# Altium PCB PCB2_Drone.PcbDoc
Units mm, origin at the board's own origin, x right, y up, seen from the top; angles counter-clockwise.
Board outline 152.4 x 101.6 mm, 2 copper layers (Top Layer, Bottom Layer); 15 components, 11 nets, 54 pads, 10 vias.
Unrouted connection lines stored in the file: 1.
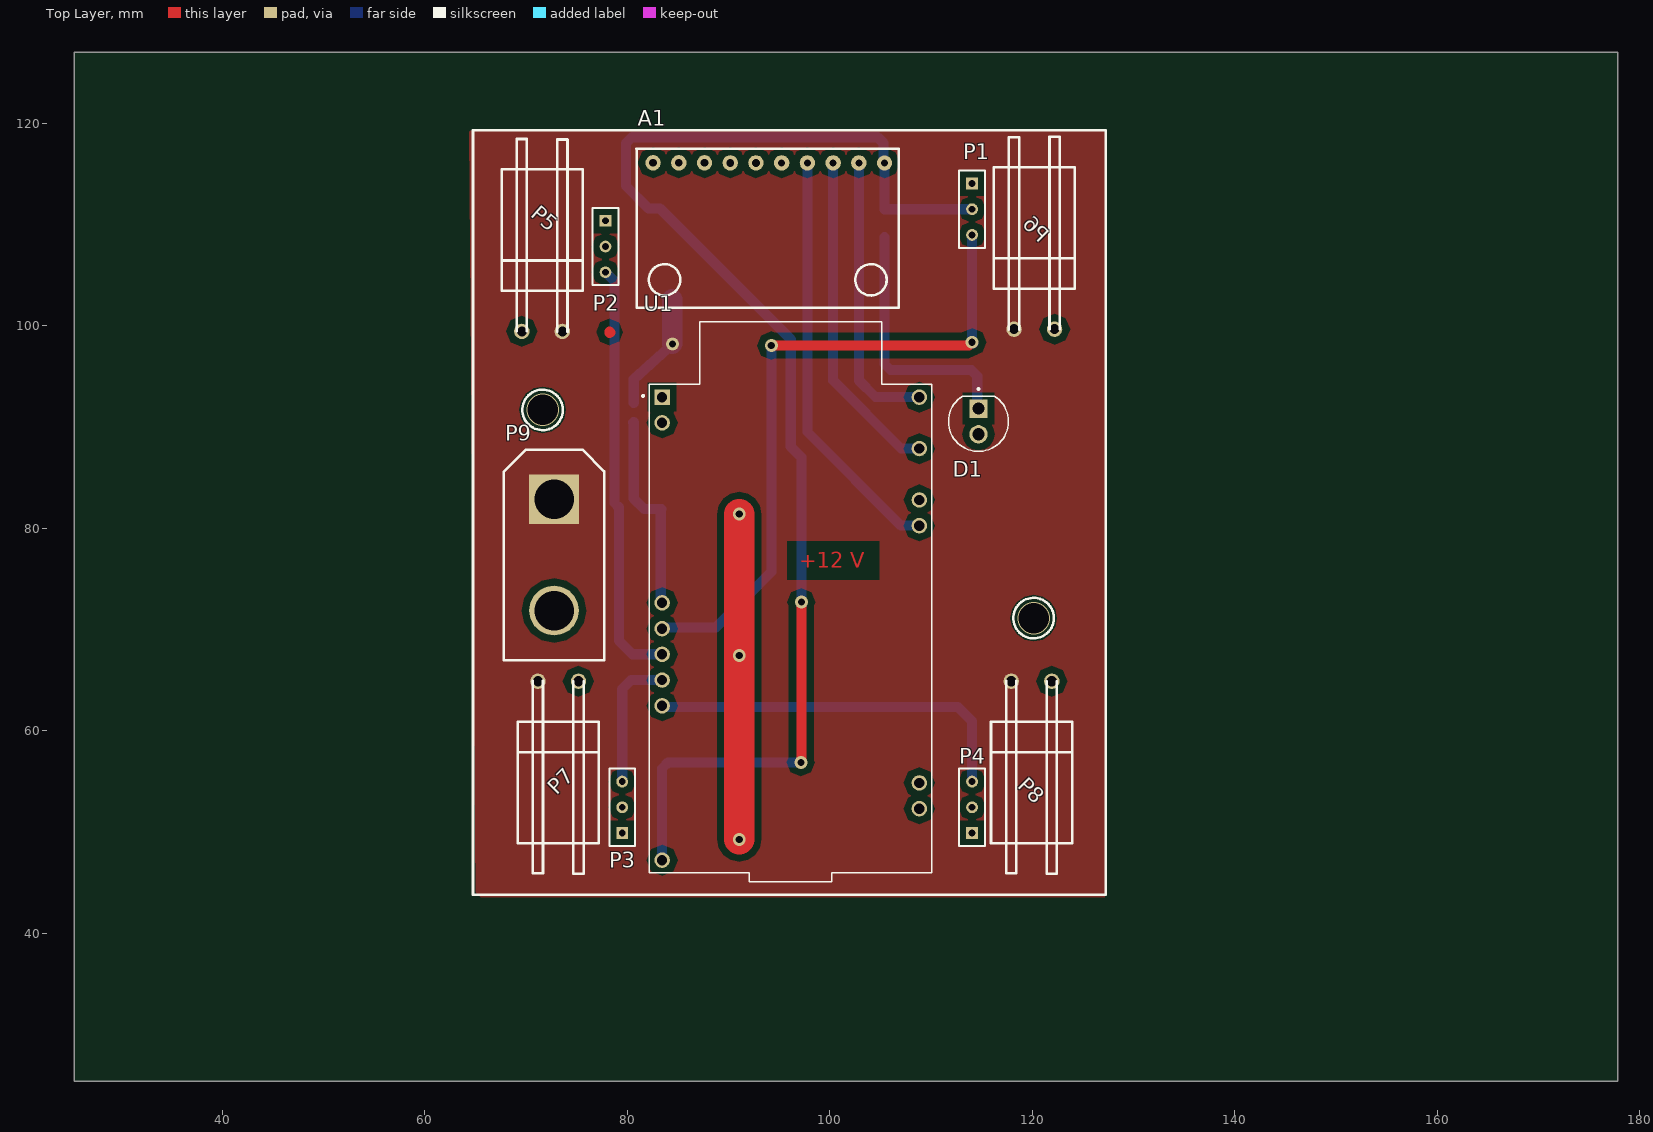
[diagram p0: Top Layer view]
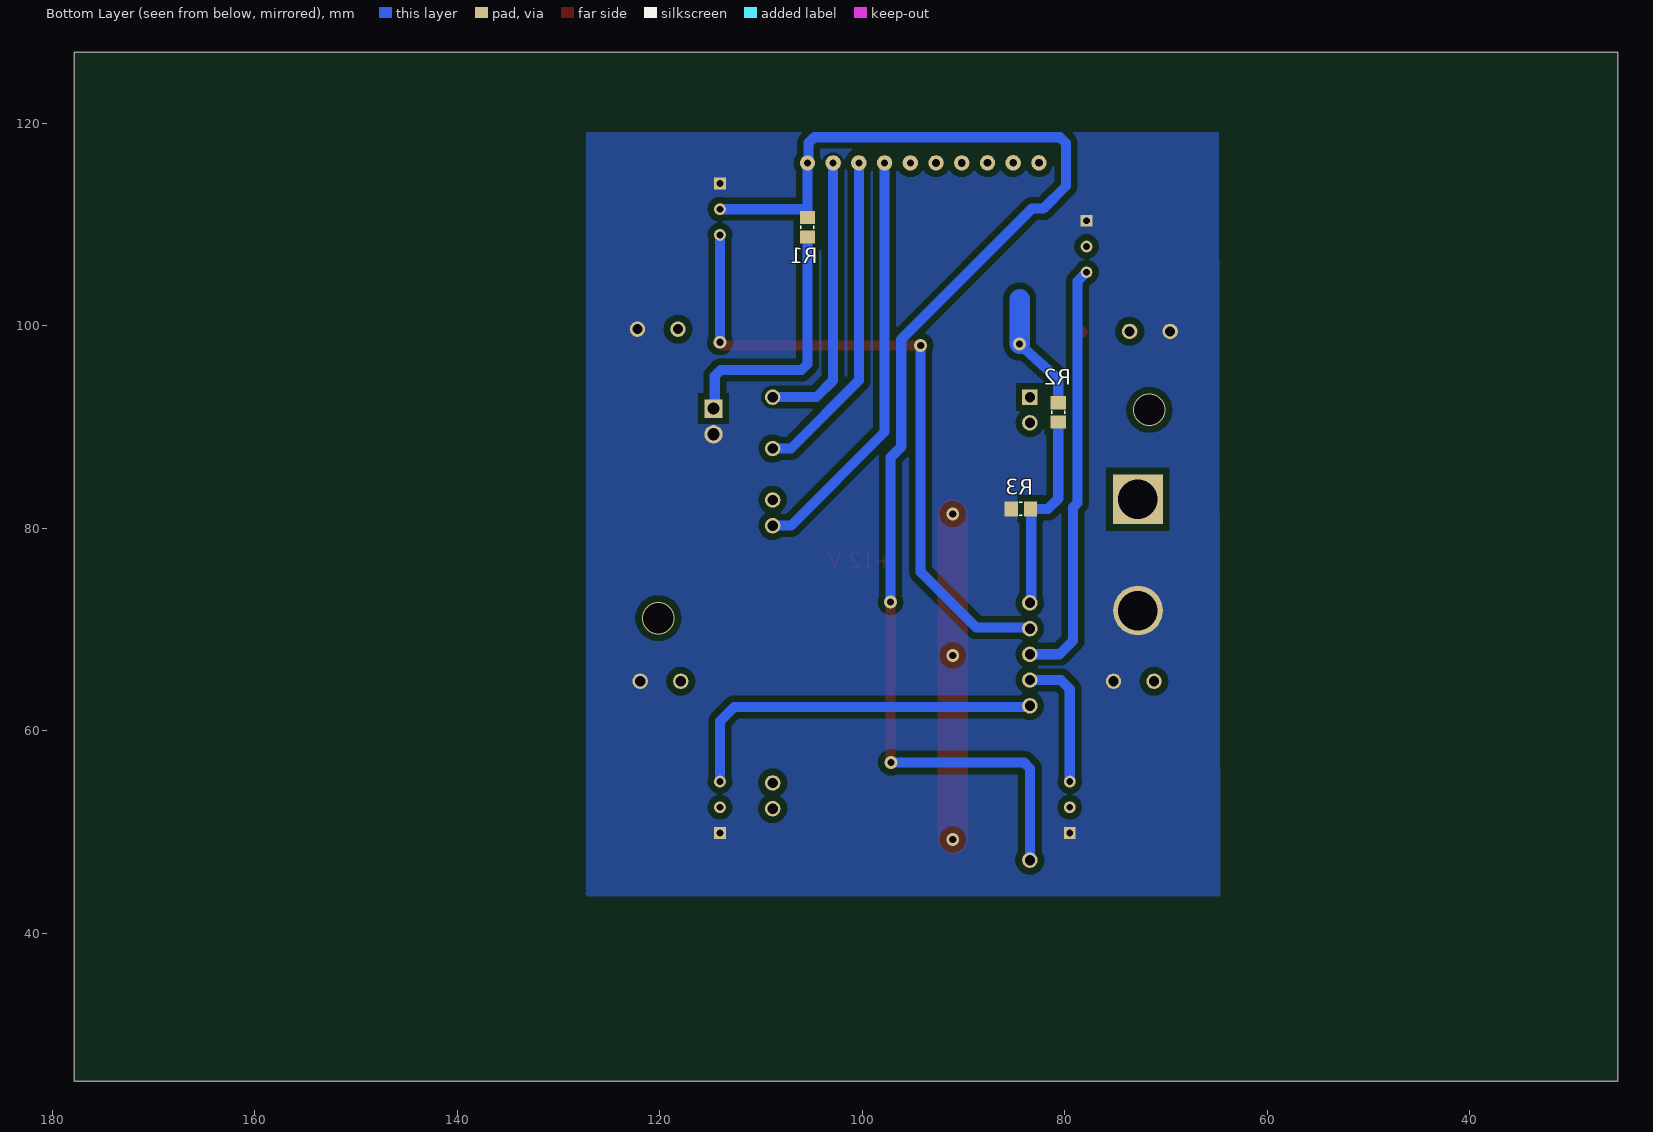
[diagram p1: Bottom Layer view, seen from below]

## Layer stack, top to bottom
Top Solder: solder mask 0.0102, Solder Resist, Dk 3.5
Top Layer: signal copper 0.0356
Dielectric 1: dielectric 0.32, FR-4, Dk 4.8
Bottom Layer: signal copper 0.0356
Bottom Solder: solder mask 0.0102, Solder Resist, Dk 3.5

## Board outline
25.4,25.4 177.8,25.4 177.8,127 25.4,127

## Design rules (kind name [scope] priority, off if disabled: settings)
Clearance [All] p1: gap=0.65 ignorepadtopadclearanceinfootprint=FALSE
PolygonConnect [All] p1: connectstyle=Direct reliefconductorwidth=0.254 reliefentries=4 polygonreliefangle="90 Angle" airgapwidth=0.254
RoutingVias [All] p1: holewidth=0.711 width=1.27 viastyle="Through Hole" minholewidth=0.711 minwidth=1.27 maxholewidth=0.711 maxwidth=1.27
SolderMaskExpansion [All] p1: expansion=0.102 istentingtop=FALSE
Width [All] p1: maxlimit=5 minlimit=0.7 preferedwidth=1
30 further rules are at their usual default settings.

## Components (designator, comment, footprint, x,y, rotation, side; value= is the part's Value field where it differs from the comment)
A1 "HW123_Acelerator" HW123_ACELEROMETER 106.815,117.482 r270 top
D1 "LED1" LEDRD254W57D500H1070 114.681,90.551 r270 top
P1 "MHDR1X3" SAMTEC_BBS-102-X-X 114.046,112.776 r270 top
P2 "MHDR1X3" SAMTEC_BBS-102-X-X 77.851,109.092 r270 top
P3 "MHDR1X3" SAMTEC_BBS-102-X-X 79.502,51.181 r90 top
P4 "MHDR1X3" SAMTEC_BBS-102-X-X 114.046,51.181 r90 top
P5 "MHDR1X2" "Header1x2 90°" 69.596,99.44 r0 top
P6 "MHDR1X2" "Header1x2 90°" 122.193,99.662 r180 top
P7 "MHDR1X2" "Header1x2 90°" 75.184,64.897 r180 top
P8 "MHDR1X2" "Header1x2 90°" 121.92,64.897 r180 top
P9 "MHDR1X2" AMASS_XT90PW-M 67.821,87.761 r0 top
R1 "Res1" CAPC2012X135N 105.41,109.728 r270 bottom value=1K
R2 "Res1" CAPC2012X135N 80.645,91.44 r270 bottom value=3K
R3 "Res1" CAPC2012X135N 84.328,81.915 r0 bottom value=1K
U1 "*" MODULE_ESP32-DEVKITC 96.139,70.104 r0 top

## Footprints (in the part's own frame and the unit in brackets; to place one, negate y for a bottom-side part, rotate by r counter-clockwise, add the part's x,y. Pads: shape width x height; smd on the part's side, far side on the other; paste and mask are expansions set on the pad)
AMASS_XT90PW-M [mm]
  rect 4.916x4.916 / inner round 4.916 / far side rect 4.916x4.916 hole 3.9: 1(4.95,-4.884)
  round 4.916 hole 3.9: 2(4.95,-15.88)
  silkscreen extent 0,-20.8 9.9,0
CAPC2012X135N [mm]
  rect 1.3x1.5 smd: 1(-0.95,0) 2(0.95,0)
  silkscreen extent -0.15,-0.65 0.15,0.65
"Header1x2 90°" [mil]
  round 60 hole 39.37: 1(0,0) 2(157.48,0)
  silkscreen extent -79,-2 236,748, body extent -80,160 235,630, height 10
HW123_ACELEROMETER [mm]
  round 1.5 hole 0.7: 1(1.405,-1.405)
  round 1.524 hole 0.7: 2(1.405,-3.945) 3(1.405,-6.485) 4(1.405,-9.025) 5(1.405,-11.565)
  round 1.524 hole 0.762: 6(1.405,-14.105) 7(1.405,-16.645) 8(1.4,-19.185) 9(1.4,-21.725) 10(1.4,-24.265)
  silkscreen extent 0,-25.91 15.7,0
LEDRD254W57D500H1070 [mm]
  rect 1.815x1.815 / inner round 1.815 / far side rect 1.815x1.815 hole 1.21: 1(-1.27,0)
  round 1.815 hole 1.21: 2(1.27,0)
  silkscreen extent -3.3,-2.96 2.96,2.96, body extent -2.6,-2.95 2.95,2.95, height 9.1
MODULE_ESP32-DEVKITC [mm]
  rect 1.53x1.53 hole 1.02: 1(-12.7,22.85)
  round 1.53 hole 1.02: 2(-12.7,20.31) 9(-12.7,2.53) 10(-12.7,-0.01) 11(-12.7,-2.55) 12(-12.7,-5.09) 13(-12.7,-7.63) 19(-12.7,-22.87) 22(12.7,-17.79) 23(12.7,-15.25) 33(12.7,10.15) 34(12.7,12.69) 36(12.7,17.77) 38(12.7,22.85)
  silkscreen extent -14.67,-25 13.95,30.3
SAMTEC_BBS-102-X-X [mm]
  rect 1.168x1.168 hole 0.66: 1(-1.27,0)
  round 1.168 hole 0.66: 2(1.27,0) 3(3.81,0)
  silkscreen extent -2.54,-1.27 5.08,1.27

## Part data
D1: "Typical RED GaAs LED", LatestRevisionDate=08-Jul-2005, LatestRevisionNote="Mech Layer 1 removed.", PackageDescription="LED; 2 Leads", PackageReference=LED-1, Published=8-Jun-2000, Publisher="Altium Limited"
P1 P2 P3 P4: "Header, 3-Pin", LatestRevisionDate=17-Jul-2002, LatestRevisionNote="Re-released for DXP Platform.", Publisher="Altium Limited"
P5 P6 P7 P8 P9: "Header, 2-Pin", LatestRevisionDate=17-Jul-2002, LatestRevisionNote="Re-released for DXP Platform.", Publisher="Altium Limited"
R1 R2 R3: "Resistor", LatestRevisionDate=17-Jul-2002, LatestRevisionNote="Re-released for DXP Platform.", PackageDescription="Axial Device, Thru-Hole; 2 Leads; 0.3 in Pin Spacing", PackageReference=AXIAL-0.3, Published=8-Jun-2000, Publisher="Altium Limited"
U1: library part ESP32-DEVKITC, "- Transceiver; 802.11 b/g/n _Wi-Fi, WiFi, WLAN_, BluetoothÂ® Smart Ready 4.x Dual Mode For Use With ESP-WROOM-32", Package=None, Availability=Unavailable, MF="Espressif Systems", MP=ESP32-DEVKITC-32D-F, Price=None, SnapEDA_Link=https://www.snapeda.com/parts/ESP32-DEVKITC-32D-F/Espressif%20Systems/view-part/4220172/?ref=snap

## Via types
v1: diameter 1.27, hole 0.711, Top Layer to Bottom Layer, 8 vias
v2: diameter 3.2, hole 3, Top Layer to Bottom Layer, 2 vias

## Nets (pads, with @x,y where several pads share a name; then routed paths per layer and width w, separated by ;. In a path a pad name is that pad's centre, name@x,y a point inside that pad or via, vN(x,y) a via of type N, cw(c..) or ccw(c..) an arc to the next point about the centre after c; other vN are vias at no path point)
+12: P5.2 P6.2 P7.2 P8.2 P9.1 R2.1 | length 11.9
  Bottom Layer w1: R2.1 80.645,94.742 v1(84.455,98.187)
  Bottom Layer w2: v1(84.455,98.187) 84.455,102.616
A: P4.3 U1.13 | length 37.2
  Bottom Layer w1: U1.13 83.54,62.373 83.915,62.373 83.931,62.357 112.649,62.357 114.046,60.96 P4.3
B: P3.3 U1.12 | length 13.5
  Bottom Layer w1: P3.3 79.502,64.135 80.391,65.024 83.429,65.024 U1.12
C: P2.3 U1.11 | length 41.7
  Bottom Layer w1: P2.3 78.745,104.388 78.745,82.498 79.168,82.075 79.168,68.914 80.518,67.564 83.429,67.564 U1.11
D: P1.3 U1.10 | length 66.3
  Top Layer w1: v1(94.227,98.044) 113.719,98.044 v1(114.046,98.371)
  Bottom Layer w1: U1.10@83.439,69.951 83.684,70.195 88.737,70.195 94.234,75.692 94.234,98.037 v1(94.227,98.044) ; P1.3 v1(114.046,98.371) v1@114.173,98.244
GND: A1.2 D1.2 P1.1 P2.1 P3.1 P4.1 P5.1 P6.1 P7.1 P8.1 P9.2 R3.2 U1.38 | length 28
  Bottom Layer w1: A1.2@102.87,115.951 102.87,94.615 104.521,92.964 108.829,92.964 U1.38
NetA1_3: A1.3 U1.36 | length 32.6
  Bottom Layer w1: A1.3@100.33,115.951 100.33,94.594 107.04,87.884 108.829,87.884 U1.36
NetA1_4: A1.4 U1.33 | length 41.3
  Bottom Layer w1: A1.4@97.79,115.951 97.79,89.514 107.04,80.264 108.829,80.264 U1.33
NetD1_1: D1.1 R1.2 | length 25.5
  Bottom Layer w1: R1.2 105.41,96.217 105.996,95.631 113.968,95.631 114.554,95.045 114.554,91.948 D1.1
P25: R2.2 R3.1 U1.9 | length 20.2
  Bottom Layer w1: R2.2@80.581,90.426 R2.2 80.645,82.931 81.661,81.915 R3.1 83.312,81.849 83.312,73.136 83.338,73.11 83.338,72.735 U1.9
VCC: A1.1 P1.2 R1.1 U1.19 | length 133.1
  Top Layer w1: v1(97.143,56.887) 97.193,56.937 v1(97.193,72.712)
  Bottom Layer w1: U1.19 83.439,56.283 84.043,56.887 v1(97.143,56.887) ; v1(97.193,72.712) 97.193,87.012 96.14,88.065 96.14,98.655 83.208,111.587 82.087,111.587 79.883,113.791 79.883,118.031 80.469,118.617 104.729,118.617 105.314,118.031 105.314,116.047 105.41,115.951 105.41,111.506 P1.2
pads on no net: A1.5 A1.6 A1.7 A1.8 A1.9 A1.10 P2.2 P3.2 P4.2 U1.1 U1.2 U1.22 U1.23 U1.34
copper on no net: | length 32.4
  Top Layer w1: 78.232,99.299 78.232,99.441 78.332,99.341
  Top Layer w3: v1(91.059,49.276) v1(91.059,67.437) v1(91.059,81.407)
  Bottom Layer w1: 108.839,92.954 108.849,92.964
  other v2: 120.127,71.134 71.643,91.687

## Polygon pours and split planes (outlines as drawn)
GND on Bottom Layer "GND_L02_P001" (solid, pour order 1): 64.77,119.253 64.897,119.126 127.254,119.126 127.254,44.069 127.381,43.942 127.127,43.688 64.643,43.688
+12 on Top Layer "+12_L01_P000" (solid, pour order 0): 64.389,119.253 127,119.253 127.127,119.126 127.127,43.561 65.532,43.561 65.024,44.069

## Other copper
Top Layer:
  text "+12 V" at 96.968,76.087 h1.5

## Silkscreen, mask and mechanical layers (free items; w line width, h text height)
Top Overlay:
  circle w0.254: c120.127,71.134 r2
  circle w0.254: c71.643,91.687 r2
  lines w0.254: 64.77,43.814 127.25,43.814 127.253,43.816 127.253,119.293 127.248,119.298 64.771,119.298 64.771,43.816 64.77,43.814